# Altium PCB PCB.PcbDoc
Units mil, origin at the board's own origin, x right, y up, seen from the top; angles counter-clockwise.
Board outline 6000 x 4000 mil, 2 copper layers (Top Layer, Bottom Layer); 9 components, 5 nets, 23 pads, 0 vias.
Unrouted connection lines stored in the file: 13.
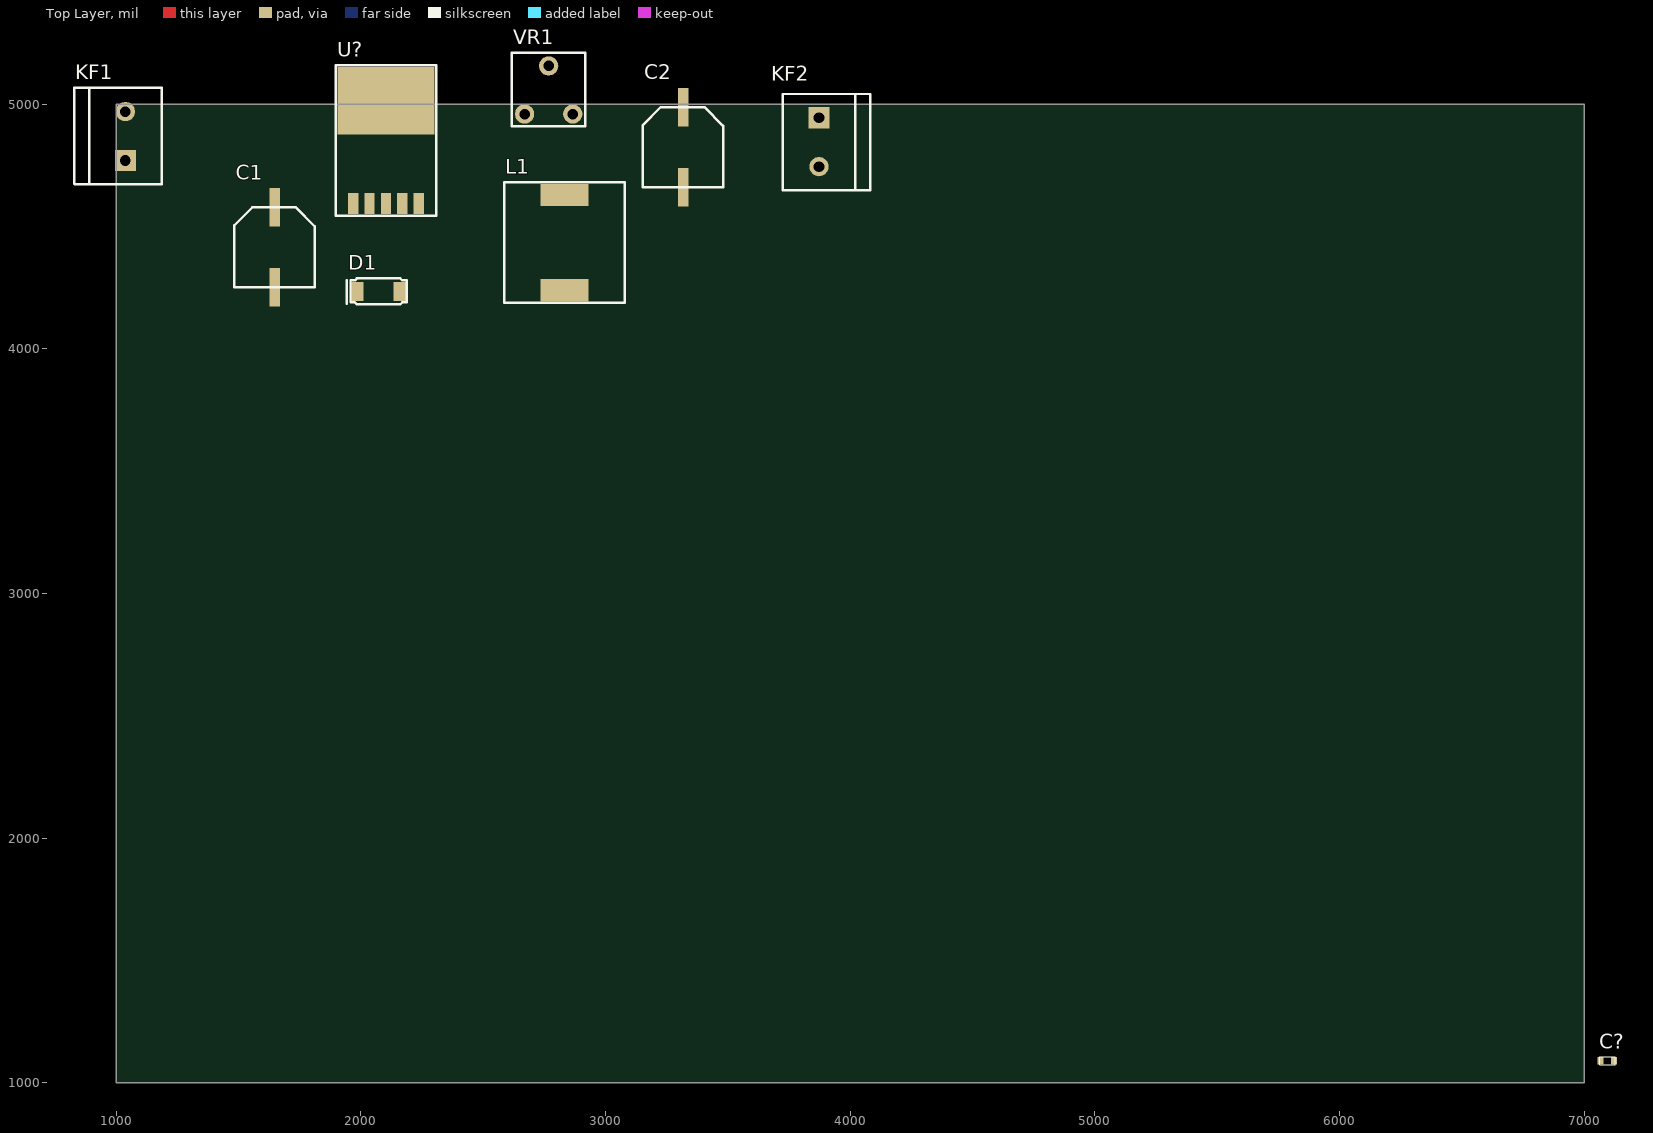
[diagram p0: Top Layer view]
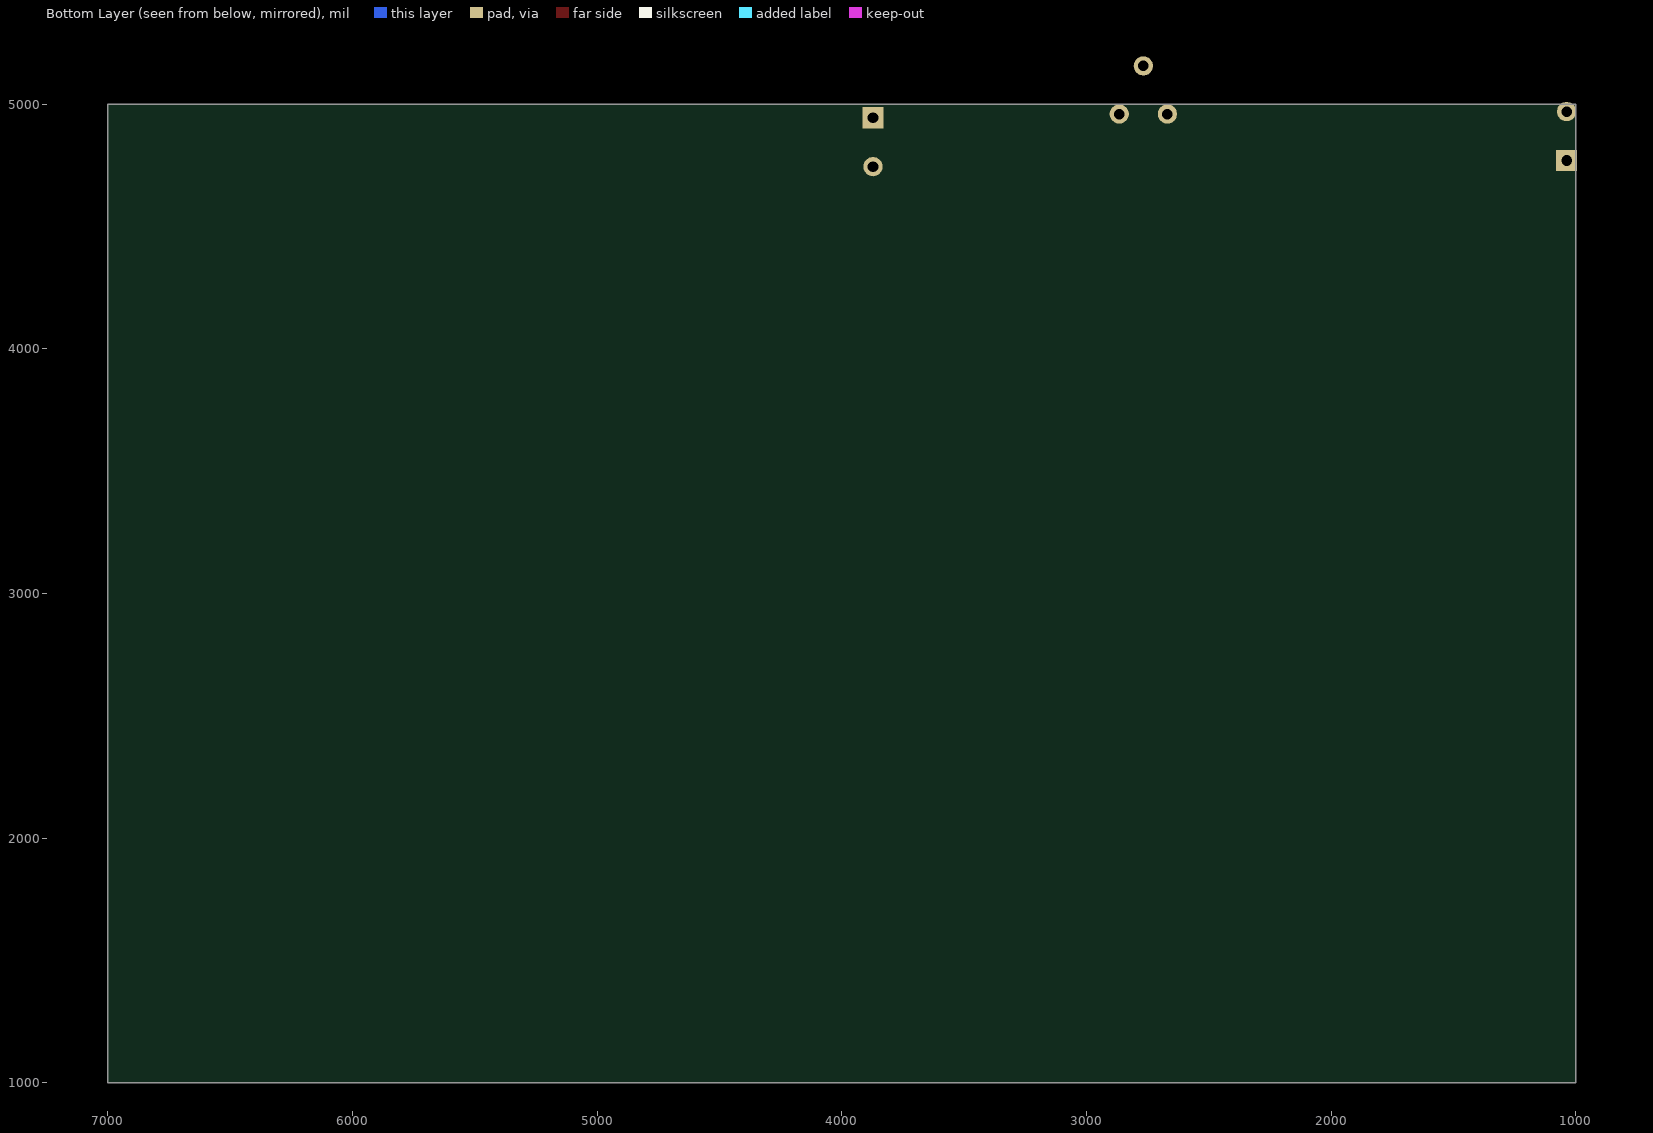
[diagram p1: Bottom Layer view, seen from below]

## Layer stack, top to bottom
Top Solder: solder mask 0.4, Solder Resist, Dk 3.5
Top Layer: signal copper 1.4
Dielectric 1: dielectric 12.6, FR-4, Dk 4.8
Bottom Layer: signal copper 1.4
Bottom Solder: solder mask 0.4, Solder Resist, Dk 3.5

## Board outline
1000,1000 7000,1000 7000,5000 1000,5000

## Design rules (kind name [scope] priority, off if disabled: settings)
Clearance [All] p1: gap=10 ignorepadtopadclearanceinfootprint=FALSE except(0: Arc-Hole Track-Hole SMDPad-Hole THPad-Hole Via-Hole Fill-Hole Poly-Hole Region-Hole Text-Hole)
PolygonConnect [All] p1: connectstyle=Relief reliefconductorwidth=10 reliefentries=4 polygonreliefangle="90 Angle" airgapwidth=10
RoomDefinition LM2596 [InComponentClass('LM2596')] p1: confinementstyle=ConfineIn formatcopy=TRUE lockcomponents=FALSE outline 6852.44,1340 10257.44,1340 10257.44,2075 6852.44,2075
RoutingVias [All] p1: holewidth=28 width=50 viastyle="Through Hole" minholewidth=28 minwidth=50 maxholewidth=28 maxwidth=50
SolderMaskExpansion [All] p1: expansion=4
Width [All] p1: maxlimit=10 minlimit=10 preferedwidth=10
30 further rules are at their usual default settings.

## Components (designator, comment, footprint, x,y, rotation, side; value= is the part's Value field where it differs from the comment)
C1 "100uF/50V" UUD1H101MNL1GS 1647.44,4415 r0 top
C2 "100uF/50V" UUD1H101MNL1GS 3317.44,4825 r0 top
C? "100pF" "C104 0603 SMD" 7095,1090 r0 top
D1 "1N5825" SS34-SMA 2072.44,4235 r90 top
KF1 "Cin" KF126 1037.44,4870 r90 top
KF2 "Cout" KF126 3872.44,4845 r270 top
L1 "470UH" RH127-471 2832.44,4434.88 r0 top
U? "LM2596-ADJ" TO263-5 2102.44,4594.72 r270 top
VR1 "10K" RM065-203 2767.44,4960 r0 top

## Footprints (in the part's own frame and the unit in brackets; to place one, negate y for a bottom-side part, rotate by r counter-clockwise, add the part's x,y. Pads: shape width x height; smd on the part's side, far side on the other; paste and mask are expansions set on the pad)
"C104 0603 SMD" [mm]
  rect 0.6x0.8 smd: 12(-0.7,0) 13(0.7,0)
  silkscreen extent -0.8,-0.4 0.8,0.4, body extent -0.8,-0.4 0.8,0.4
KF126 [mm]
  rect 2.2x2.2 hole 1.1: 1(-2.54,0)
  round 2 hole 1.1: 2(2.54,0)
  silkscreen extent -5,-3.75 5,5.33, body extent -5.63,-5.21 5.13,5.29, height 14.85
RH127-471 [mm]
  rect 5x2.3 smd: 1(0,-4.95) 2(0,4.95)
  silkscreen extent -6.25,-6.25 6.25,6.25, body extent -6.25,-6.25 6.25,6.25, height 5.8
RM065-203 [mm]
  round 2 hole 1.1: 1(-2.5,0) 2(0,5) 3(2.5,0)
  silkscreen extent -3.81,-1.27 3.81,6.35, body extent -3.25,-1.13 3.25,5.92, height 7
SS34-SMA [mm]
  rect 2x1.3 smd: 1(0,-2.2) 2(0,2.2)
  silkscreen extent -1.35,-2.92 1.35,3.3, body extent -1.35,-2.46 1.35,2.54, height 2.3
TO263-5 [mm]
  rect 2.16x1.07 smd: 1(0,-3.4) 2(0,-1.7) 3(0,0) 4(0,1.7) 5(0,3.4)
  rect 6.99x10.08 smd: 6(-10.675,0)
  silkscreen extent -14.35,-5.21 1.27,5.21, body extent -13.89,-5.08 0.13,5.08, height 4.56
UUD1H101MNL1GS [mm]
  rect 1.1x4 smd: 1(0,4.15) 2(0,-4.15)
  silkscreen extent -4.19,-4.15 4.15,4.15, body extent -4.15,-4.5 4.15,4.5, height 6.2

## Part data
C1 C2: "CAP ALUM 100UF 50V SMD", Supplier Part Number 1=493-2306-1-ND, Supplier 1=Digi-Key
C?: library part "C104 SMD", "0603 SMD CAP", Supplier Part Number 2=478-1175-1-ND
D1: library part "Schottky 3A 40V SMA", "DIODE SCHOTTKY 3A 40V SMA", Supplier Part Number 1=B340LA-FDICT-ND, Supplier 1=Digi-Key
KF1 KF2: library part KF2, "2P-KF126 Domino"
L1: library part "L SMD", "470UH 0.79A, Size 12 x 12 x 8, SMD Inductor", Supplier Part Number 1=595-1460-1-ND, Supplier 1=Digi-Key
U?: library part LM2596, "IC BUCK ADJ 3A TO263-5", Supplier Part Number 1=LM2596S-ADJ/NOPB-ND, Supplier 1=Digi-Key
VR1: library part "VR Res"

## Nets (pads, with @x,y where several pads share a name; then routed paths per layer and width w, separated by ;. In a path a pad name is that pad's centre, name@x,y a point inside that pad or via, vN(x,y) a via of type N, cw(c..) or ccw(c..) an arc to the next point about the centre after c; other vN are vias at no path point)
GND: C1.2 C2.2 D1.1 KF1.1 KF2.2 U?.3 U?.5
NetC1_1: C1.1 KF1.2 U?.1
NetC2_1: C2.1 KF2.1 L1.2 VR1.1
NetC?_2: U?.4
NetD1_2: D1.2 L1.1 U?.2
pads on no net: C?.12 C?.13 U?.6 VR1.2 VR1.3